# EAGLE board T02 (EAGLE 9.7.0)

Size 62 x 66.71 mm. Coordinates in mm from the lower left corner, seen from the top.
Outline: 0,0 62,0 62,66.72 0,66.72 0,0
Copper layers (1*16): Top 0.035mm / dielectric 1.5mm / Bottom 0.035mm
Design rules "default": minimum track width 6mil, minimum drill 0.35mm, track to track 6mil, track to pad 6mil, pad to pad 6mil, via to via 6mil, smd to smd 6mil, copper to edge 40mil, drill to drill 6mil, minimum pad ring 10mil, minimum via ring 8mil, stop-mask expansion 4mil, vias tented up to drill 0mil, thermal gap 10mil

## Footprints (pad centres in the part's own frame; a part is rotated, then mirrored left to right if it is on the bottom)
LEDRD254W60D565H860B_B = drill 0.981 pad 1.581: 1 -1.27,0; 2 1.27,0
7SEG-13 = drill 0.813 long: 1 -5.08,-7.62; 2 -2.54,-7.62; 3 0,-7.62; 4 2.54,-7.62; 5 5.08,-7.62; 6 5.08,7.62; 7 2.54,7.62; 8 0,7.62; 9 -2.54,7.62; 10 -5.08,7.62
BATTERY-GENERIC = drill 1.118 pad 3.15 octagon: + 2.54,0; - -2.54,0
RESAD1016W63L850D250B = drill 0.83 pad 1.43: 1 -5.08,0; 2 5.08,0

## Placement (x,y rotation side)
D1  BLUE  [LEDRD254W60D565H860B_B]  43.56,24.26 180 top
DIGIT1  7SEG-CA  [7SEG-13]  9.27,14.1 0 top
P1  BATTERYGENERIC  [BATTERY-GENERIC]  53.74,58.46 180 top
R1  1k  [RESAD1016W63L850D250B]  44.83,31.88 90 top
R2  1k  [RESAD1016W63L850D250B]  9.27,31.88 90 top

## Library data of the parts
D1 = Tinkercad; CATEGORY: Opto-Electronic; SUB-CATEGORY: LED; VALUE: LED_BLUE
DIGIT1 = Tinkercad; CATEGORY: Opto-Electronic; SUB-CATEGORY: Display; TYPE: 7-Segment
P1 R1 R2 = Tinkercad

## Nets
D1_A: D1.1 R1.1
DIGIT1_CA2: DIGIT1.8 R2.1
P1+: P1.+ R1.2 R2.2
P1-: D1.2 DIGIT1.4 DIGIT1.6 P1.-

## Tracks (layer width: path | path; a pad name or v marks a point on that pad's centre or on a via)
D1_A  (1 unrouted)
DIGIT1_CA2  (1 unrouted)
P1+  (2 unrouted)
P1-  (3 unrouted)